# Altium PCB PCB1.PcbDoc
Units mil, origin at the board's own origin, x right, y up, seen from the top; angles counter-clockwise.
Board outline 6000 x 4000 mil, 2 copper layers (Top Layer, Bottom Layer); 14 components, 8 nets, 40 pads, 0 vias.
Unrouted connection lines stored in the file: 20.
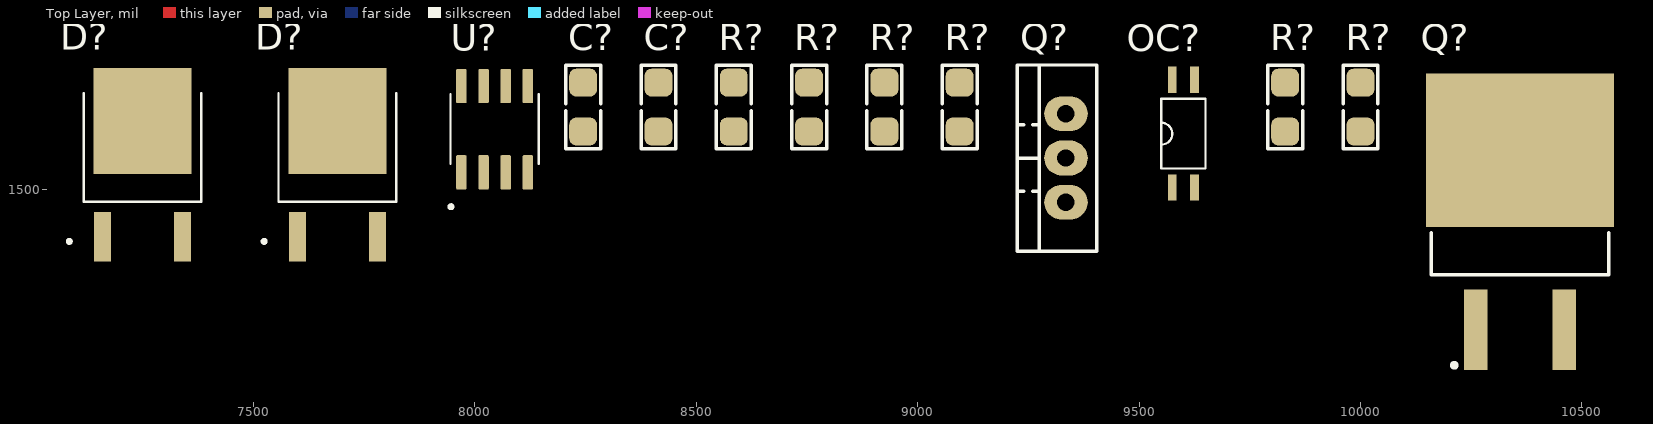
[diagram p0: Top Layer view]
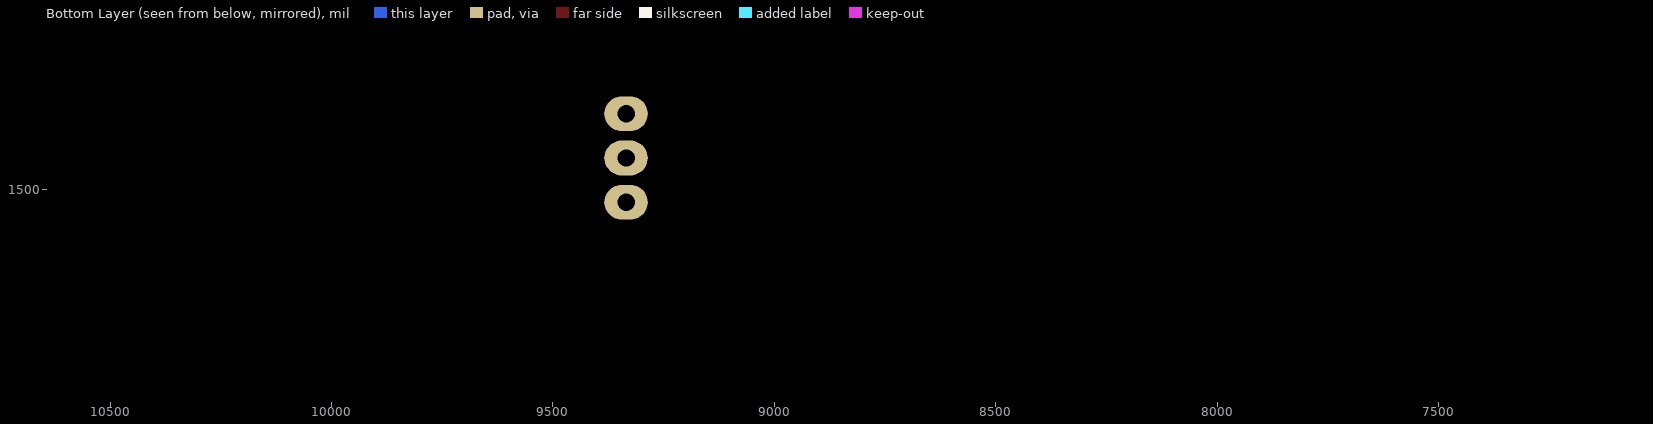
[diagram p1: Bottom Layer view, seen from below]

## Layer stack, top to bottom
Top Solder: solder mask 0.4, Solder Resist, Dk 3.5
Top Layer: signal copper 1.4
Dielectric 1: dielectric 12.6, FR-4, Dk 4.8
Bottom Layer: signal copper 1.4
Bottom Solder: solder mask 0.4, Solder Resist, Dk 3.5

## Board outline
1000,1000 7000,1000 7000,5000 1000,5000

## Design rules (kind name [scope] priority, off if disabled: settings)
Clearance [All] p1: gap=10 ignorepadtopadclearanceinfootprint=FALSE except(0: Arc-Hole Track-Hole SMDPad-Hole THPad-Hole Via-Hole Fill-Hole Poly-Hole Region-Hole Text-Hole)
PolygonConnect [All] p1: connectstyle=Relief reliefconductorwidth=10 reliefentries=4 polygonreliefangle="90 Angle" airgapwidth=10
RoutingVias [All] p1: holewidth=28 width=50 viastyle="Through Hole" minholewidth=28 minwidth=50 maxholewidth=28 maxwidth=50
SolderMaskExpansion [All] p1: expansion=4 istentingtop=FALSE
Width [All] p1: maxlimit=10 minlimit=10 preferedwidth=10
30 further rules are at their usual default settings.

## Classes and differential pairs
component class Sheet1: C? D? J? OC? Q? R? U?

## Components (designator, comment, footprint, x,y, rotation, side; value= is the part's Value field where it differs from the comment)
C? "CAP1206 10nf 50V" C1206 8415,1685 r90 top
C? "CAP1206 100nf 50V" C1206 8245,1685 r90 top
D? "SDT20B100D1" DPAK229P990X238-3N 7690,1555 r0 top
D? "SDT20B100D1" DPAK229P990X238-3N 7250,1555 r0 top
OC? "EL817S1" SO4 9600,1625 r0 top
Q? "TJ15S10M3" TO220_3 9335,1570 r90 top
Q? "IRF9530NS" TO254P1528X508-4_3N-V1 10360,1385 r90 top
R? "RES1206 12K 1%" R1206 9095,1685 r90 top
R? "RES1206 12K 1%" R1206 8585,1685 r90 top
R? "RES1206 12K 1%" R1206 10000,1685 r90 top
R? "RES1206 12K 1%" R1206 9830,1685 r90 top
R? "RES1206 12K 1%" R1206 8925,1685 r90 top
R? "RES1206 470 1%" R1206 8755,1685 r90 top
U? "MT9223-20BR5" SOIC127P600X175-8N 8045,1635 r90 top

## Footprints (in the part's own frame and the unit in brackets; to place one, negate y for a bottom-side part, rotate by r counter-clockwise, add the part's x,y. Pads: shape width x height; smd on the part's side, far side on the other; paste and mask are expansions set on the pad)
C1206 [mm] "CHIP Capacitor, 3.2X1.6mm, 1206"
  rrect50% 1.6x1.6 smd paste-0.8 mask+0.075: 1(-1.4,0) 2(1.4,0)
  Top Layer pour cut-out: -0.8,1 -0.8,-1 0.8,-1 0.8,1
  silkscreen extent -2.4,-1 2.4,1, body extent -1.6,-0.8 1.6,0.8, height 1
DPAK229P990X238-3N [mm]
  rect 0.97x2.83 smd: 1(-2.29,-4.14) 3(2.29,-4.14)
  rect 5.63x6.09 smd: 4(0,2.51)
  silkscreen extent -4.3,-4.5 3.37,4.09, body extent -4.95,-3.25 4.95,3.25, height 2.39
R1206 [mm] "CHIP RESISTOR 1/4 WATT, Body 3.2x1.6mm,1206, 3216"
  rrect50% 1.6x1.6 smd paste-0.8 mask+0.075: 1(-1.4,0) 2(1.4,0)
  Top Layer pour cut-out: -0.8,1 -0.8,-1 0.8,-1 0.8,1
  silkscreen extent -2.4,-1 2.4,1, body extent -1.67,-0.86 1.68,0.87, height 0.85
SO4 [mm]
  rect 0.5x1.5 smd: 1(-0.635,-3.087) 2(0.635,-3.087) 3(0.635,3.087) 4(-0.635,3.087)
  silkscreen extent -1.27,-2 1.27,2, body extent -3.5,-1.85 3.5,1.85, height 2.3
SOIC127P600X175-8N [mm]
  rrect25% 1.97x0.6 smd paste+0 mask+0.102: 1(-2.475,1.905) 2(-2.475,0.635) 3(-2.475,-0.635) 4(-2.475,-1.905) 5(2.475,-1.905) 6(2.475,-0.635) 7(2.475,0.635) 8(2.475,1.905)
  silkscreen extent -4.54,-2.52 2,2.6
TO220_3 [mm] "TO-220 3 LEAD, TO-262, pitch: 2.54mm  10x4.5mm"
  oval 2x2.5 hole 1: 1(-2.54,0) 2(0,0) 3(2.54,0)
  silkscreen extent -5.33,-1.78 5.33,2.79, body extent -5.2,-1.85 5.2,2.65, height 19
TO254P1528X508-4_3N-V1 [mm] "TO,2.54mm pitch;3 pin,15.28mm L X 9.00mm W X 5.08mm H body"
  rect 4.6x1.35 smd paste-0.05 mask+0: 1(-5.155,2.54) 3(-5.155,-2.54)
  rect 8.8x10.8 smd paste-4.4 mask+0: 2(5.155,0)
  silkscreen extent -7.31,-5.1 0.4,5.1, body extent -6.59,-5.08 8.69,5.08, height 5.09

## Part data
C? C?: library part CAP_SMD_MLCC_1206, "CAP, MLCC", ASSEMBLY=ASSEMBLY, MANF=-, MANF_P#=MANF_PART#, PARAM="-, -%", PARAM2=-V, PRICE="100= 1$"
D? D?: library part MBRD835L, "Diode Schottky 35 V 8A Surface Mount DPAK", Package="TO-252-3 MICROSS/On Semiconductor", Check_prices=https://www.snapeda.com/parts/MBRD835L/Onsemi/view-part/?ref=eda, MF="ON Semiconductor", MP=MBRD835L, SnapEDA_Link=https://www.snapeda.com/parts/MBRD835L/Onsemi/view-part/?ref=snap
OC?: library part TLP293, "Optoisolator Transistor Output 3750Vrms 4 Channel 16-SO", Package="SOIC-4 Toshiba", Check_prices=https://www.snapeda.com/parts/TLP293/Toshiba/view-part/?ref=eda, MF="Toshiba Semiconductor", MP=TLP293, SnapEDA_Link=https://www.snapeda.com/parts/TLP293/Toshiba/view-part/?ref=snap
Q?: library part MOSP_IRF5305_TO220, "MOSFET P-CHANNEL, 55V, -31A, 6mO, Vth-4.0", ASSEMBLY=ASSEMBLY, MANF_P#=IRF5305
Q?: "OptiMOS - P2 Power-Transistor, P-channel-Enhancement mode, VDS -30V", Manufacturer="Infineon Technologies", Manufacturer Order NumberManufacturer Order Number=IRF9530NS, PackageReference=PG-TO263-3-901
R? R? R? R? R? R?: library part RES_SMD_1206, "RESISTOR, SMD", ASSEMBLY=ASSEMBLY, DESC=DESCRIPTION, DIST#=MOUSER, MANF=-, MANF_P#=-, PARAM="1%, 0.25W", PARAM2=-, PRICE=-
U?: library part ACS712ELCTR-05B-T, Package=None, Availability=Unavailable, MF="{'manufacturer': u'Allegro MicroSystems'}", MP=ACS712ELCTR-05B-T, PRICE=None

## Nets (pads, with @x,y where several pads share a name; then routed paths per layer and width w, separated by ;. In a path a pad name is that pad's centre, name@x,y a point inside that pad or via, vN(x,y) a via of type N, cw(c..) or ccw(c..) an arc to the next point about the centre after c; other vN are vias at no path point)
GND: D?.1 D?.3 R?.2@8925,1740.12 R?.2@9095,1740.12
MCUGND: C?.1 R?.2@8585,1740.12 R?.2@8755,1740.12 U?.5
NetC?_2: C?.2@8415,1740.12 OC?.1 R?.1@8585,1629.88
NetD?_4: D?.4
NetOC?_2: OC?.2 R?.1@8755,1629.88
NetOC?_3: OC?.3 R?.1@8925,1629.88 R?.1@9095,1629.88
NetOC?_4: OC?.4 Q?.1@9335,1470 R?.2@9830,1740.12 R?.2@10000,1740.12
NetQ?_3: Q?.3@9335,1670 R?.1@9830,1629.88 R?.1@10000,1629.88
pads on no net: C?.2@8245,1740.12 Q?.1@10260,1182.05 Q?.2 Q?.3@10460,1182.05 U?.1 U?.2 U?.3 U?.4 U?.6 U?.7 U?.8